# Altium PCB TSI_SAMP_SAMI_V3.4.PcbDoc (part 2 of 5)
Units mm, origin at the board's own origin, x right, y up, seen from the top; angles counter-clockwise.
Board outline 189 x 127.41 mm, 4 copper layers (Top Layer, GROUND, POWER, Bottom Layer), stack 1.56 mm thick; 227 components, 161 nets, 868 pads, 584 vias.
Unrouted connection lines stored in the file: 18.
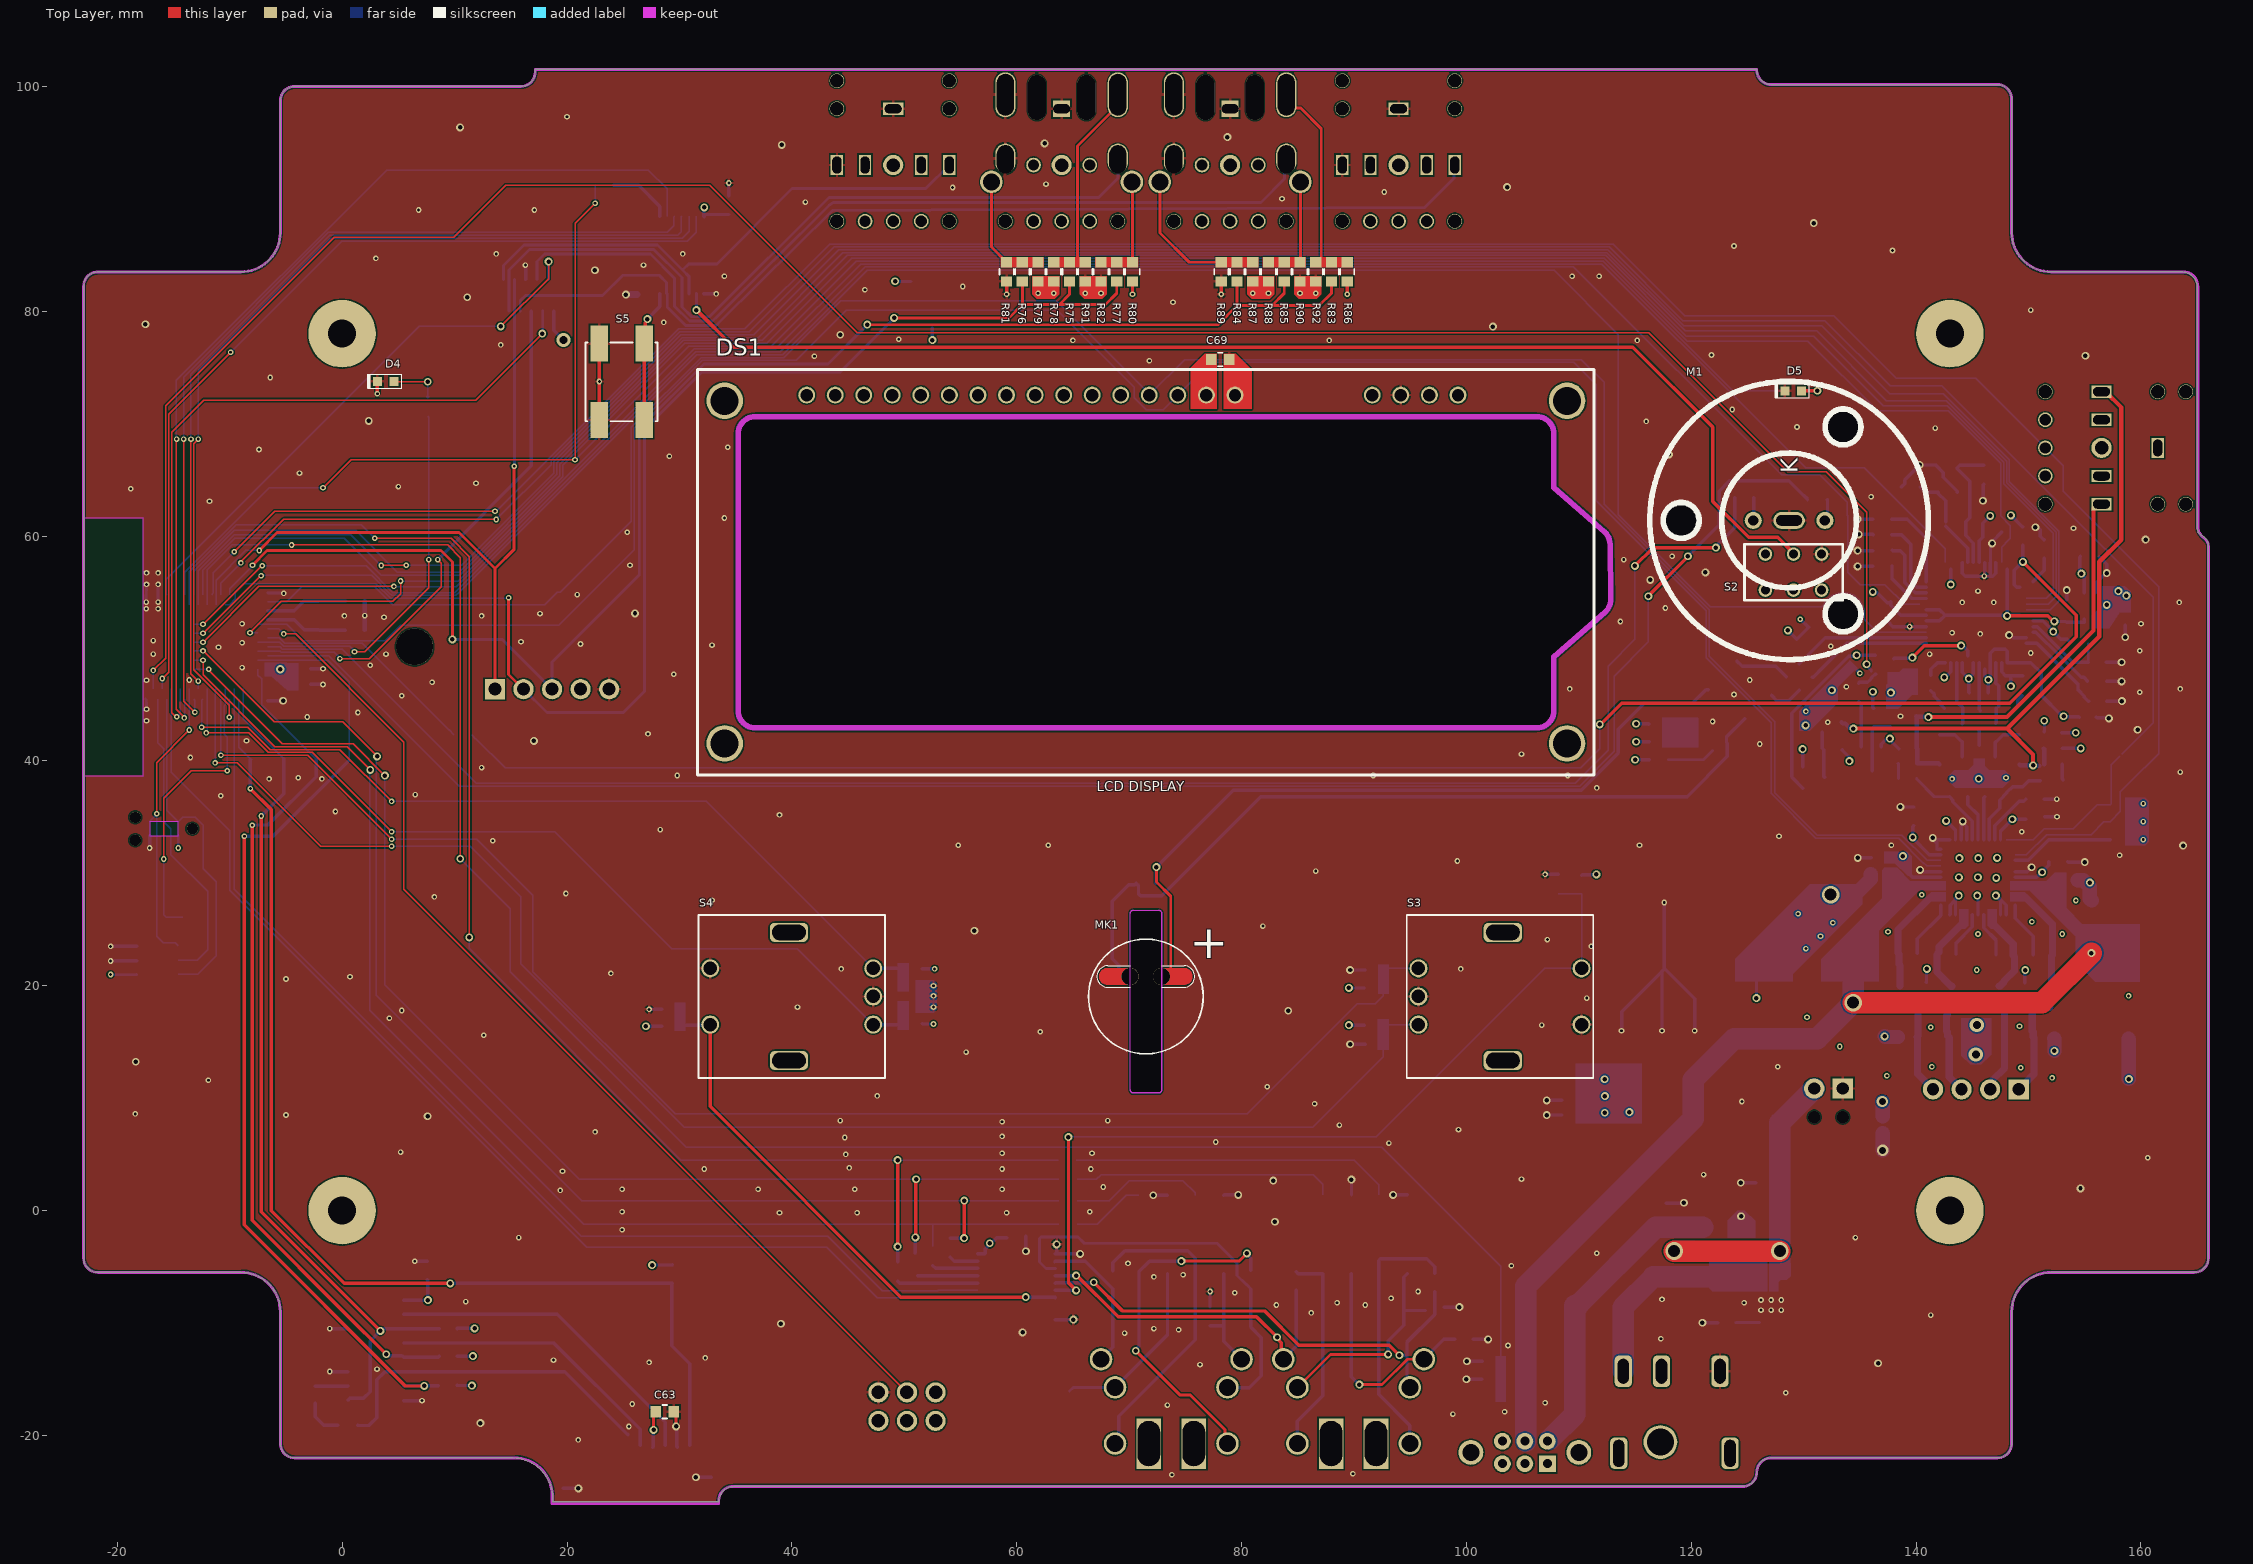
[diagram p0: Top Layer view]

## Part data (continued)
J10: library part 68000-105HTLF, "68000-105HTLF-B/S SR HDR 1*5", Manufacturer 1="Amphenol Communication Solutions", Supplier Part Number 1=609-68000-105HTLF-ND, Datasheet Link=https://cdn.amphenol-cs.com/media/wysiwyg/files/drawing/68000.pdf, Geometry.Height=8.58mm, Manufacturer Part Number 1=68000-105HTLF, Supplier 1=DigiKey, Supplier 2=Mouser, Supplier Part Number 2=649-68000-105HTLF
J11: library part 3220-10-0300-00, "Connector Header Surface Mount 10 position 0.050\" (1.27mm)", Manufacturer 1="CNC Tech", Supplier Part Number 1=1175-1629-ND, Datasheet Link=https://www.cnctech.us/pdfs/3220-XX-0300-00_.pdf, Manufacturer Part Number 1=3220-10-0300-00, Supplier 1=DigiKey
M1: library part "LED Dome_4LED", "LENS WHITE 170DEG DIFFUSER SNAP", Color=White, For Use With/Related Manufacturer=-, Manufacturer="Khatod North America LLC", Manufacturer Part Number=PLJT20, Supplier Part Number 1=1621-1053-ND, Category=Optoelectronics, ComponentLink1Description=http://download.khatod.com/documents/pljt20_test_report.pdf, ComponentLink1URL=http://download.khatod.com/documents/pljt20_test_report.pdf, Lens Size="23mm Dia", Lens Style="Round with Domed Top", Lens Transparency=Diffused, Material=Polycarbonate, Mounting Type="Snap In", Optical Pattern=Diffuser, Part Status=Active, Pricing 1="1=3.32, 10=2.941, 50=2.1818, 100=1.8972, 250=1.70748 (USD)", RoHS="RoHS Compliant", Stock 1=241, Supplier 1=Digi-Key, Type=Lens, Viewing Angle=170°
MK1: library part MIC_ELECTRET_CASTLE_PAD, "20 Hz ~ 20 kHz Analog Microphone Electret Condenser Omnidirectional (-24dB ±3dB) Solder Pads", Manufacturer="PUI Audio, Inc.", Manufacturer Product Number=AOM-5024L-HD-R, Supplier Part Number 1=668-1596-ND, Supplier 1=Digi-Key
P1: library part "TERM BLK 4P SIDE ENT 2.54MM PCB", "4 Position Wire to Board Terminal Block Horizontal with Board 0.100\" (2.54mm) Through Hole", Manufacturer="Phoenix Contact", Supplier Part Number 1=277-1275-ND, Manufacturer Link=https://media.digikey.com/pdf/Data%20Sheets/Phoenix%20Contact%20PDFs/1725672.pdf, Manufacturer Part Number=1725672, RoHS=Y, Supplier 1=Digi-Key, Supplier 2=Mouser, Supplier Part Number 2=651-1725672
P2: library part "TERM BLK 2P SIDE ENT 2.54MM PCB", "2 Position Wire to Board Terminal Block Horizontal with Board 0.100\" (2.54mm) Through Hole", Manufacturer="Phoenix Contact", Supplier Part Number 1=277-1273-ND, Manufacturer Link=https://media.digikey.com/pdf/Data%20Sheets/Phoenix%20Contact%20PDFs/1725656_Ds.pdf, Manufacturer Part Number=1725656, RoHS=Y, Supplier 1=Digi-Key, Supplier 2=Mouser, Supplier Part Number 2=651-1725656
Q1: library part MOSFET_P-CH_20V_3.6A_SOT23, "Trans MOSFET P-CH 20V 3.6A 3-Pin SOT-23 T/R", Case/Package=TO-236-3, Continuous Drain Current (ID)=3.6A, Drain to Source Voltage (Vdss)=20V, Input Capacitance=1.243nF, Manufacturer="ON Semiconductor", Manufacturer Part Number=NTR3A052PZT1G, Max Operating Temperature=150°C, Max Power Dissipation=860mW, Min Operating Temperature=-55°C, Supplier Part Number 1=31-DMP2045UQ-7CT-ND, Category=MOSFETs, ComponentLink1Description=http://www.onsemi.com/pub/Collateral/NTR3A052PZ-D.PDF?src-supplier=Digi-Key, ComponentLink1URL=http://www.onsemi.com/pub/Collateral/NTR3A052PZ-D.PDF?src-supplier=Digi-Key, Mount="Surface Mount", Packaging="Cut Tape", Pricing 1="1=0.44000, 10=0.37500, 25=0.35040, 100=0.28030, 500=0.22022, 1000=0.17017 (USD)", Rds On Max=47mR, RoHS=Yes, RoHS Compliant=Yes, Stock 1=9236, Supplier 1=Digi-Key
Q2 Q3 Q4 Q5: Supplier Part Number 1=BC848CLT1GOSDKR-ND, Supplier 1=DigiKey, Supplier 2=Mouser, Supplier Part Number 2=863-BC848CLT1G
R1 R4 R39 R40 R41 R42 R52 R53 R54 R55: library part RES_100K_0603, "Res Thick Film 0603 100K Ohm 5% 0.33W(1/3W) ±200ppm/°C Pad SMD Automotive T/R", Case Code (Imperial)=0603, Case Code (Metric)=1608, Manufacturer="Vishay Dale", Manufacturer Part Number=CRCW0603100KJNEAHP, Max Operating Temperature=155°C, Max Power Dissipation=250mW, Min Operating Temperature=-55°C, Package Quantity=5000, Resistance=100kR, Resistor Type="Thick Film", Supplier Part Number 1=541-100KSACT-ND, Temperature Coefficient=200ppm/°C, Tolerance=5%, Voltage Rating=75V, Case/Package=0603, Category="Chip SMD Resistors", ComponentLink1Description=https://datasheet.ciiva.com/5548/crcwhpe3-46056-5548151.pdf?src-supplier=Mouser, ComponentLink1URL=https://datasheet.ciiva.com/5548/crcwhpe3-46056-5548151.pdf?src-supplier=Mouser, Contact Plating=Tin, Features="Automotive AEC-Q200", Height=0.45mm, Lead Free="Lead Free", Length=1.6mm, Number of Terminations=2, Packaging="Tape and Reel", Power Rating=250mW, Pricing 1="1=0.16000, 10=0.13500, 100=0.05290, 1000=0.02215, 2500=0.02030 (USD)", Radiation Hardening=No, RoHS=Yes, RoHS Compliant=Yes, Series=CRCW-HP, Stock 1=27580, Supplier 1=Digi-Key, Weight=7.1E-05oz, Width=0.8mm
R2: library part RES_3.6M_0603, "RES 3.6M OHM 1% 1/10W 0603", Supplier Part Number 1=RMCF0603FT3M60CT-ND, Supplier 1=Digi-Key
R3: library part "2M Resistor", "RES 2M OHM 5% 1/10W 0603", Manufacturer 1=YAGEO, Manufacturer Part Number 1=RC0603JR-072ML, Supplier Part Number 1=311-2.0MGRCT-ND, Supplier 1=DigiKey, Supplier 2=Mouser, Supplier 3=Avnet, Supplier Part Number 2=603-RC0603JR-072ML, Supplier Part Number 3=49AK2948
R5 R6 R9 R10: library part RES_20K_0603, "20 kOhms ±1% 0.1W, 1/10W Chip Resistor 0603 (1608 Metric) Automotive AEC-Q200 Thick Film", Supplier Part Number 1=RMCF0603FT20K0CT-ND, Supplier 1=Digi-Key
R7: library part RES_2K1_0603, "2.1 kOhms ±1% 0.1W, 1/10W Chip Resistor 0603 (1608 Metric) Moisture Resistant Thick Film", Manufacturer=YAGEO, Manufacturer Product Number=RC0603FR-072K1L, Resistance="2.1 kOhms", Supplier Part Number 1=311-2.10KHRCT-ND, Supplier 1=DigiKey, Supplier 2=Mouser, Supplier Part Number 2=603-RC0603FR-072K1L